# Altium PCB ArdUno_AADsm5-42b_pcb.PcbDoc
Units mm, origin at the board's own origin, x right, y up, seen from the top; angles counter-clockwise.
Board outline 68.58 x 53.34 mm, 2 copper layers (Top Layer, Bottom Layer), stack 1.57 mm thick; 64 components, 58 nets, 241 pads, 171 vias.
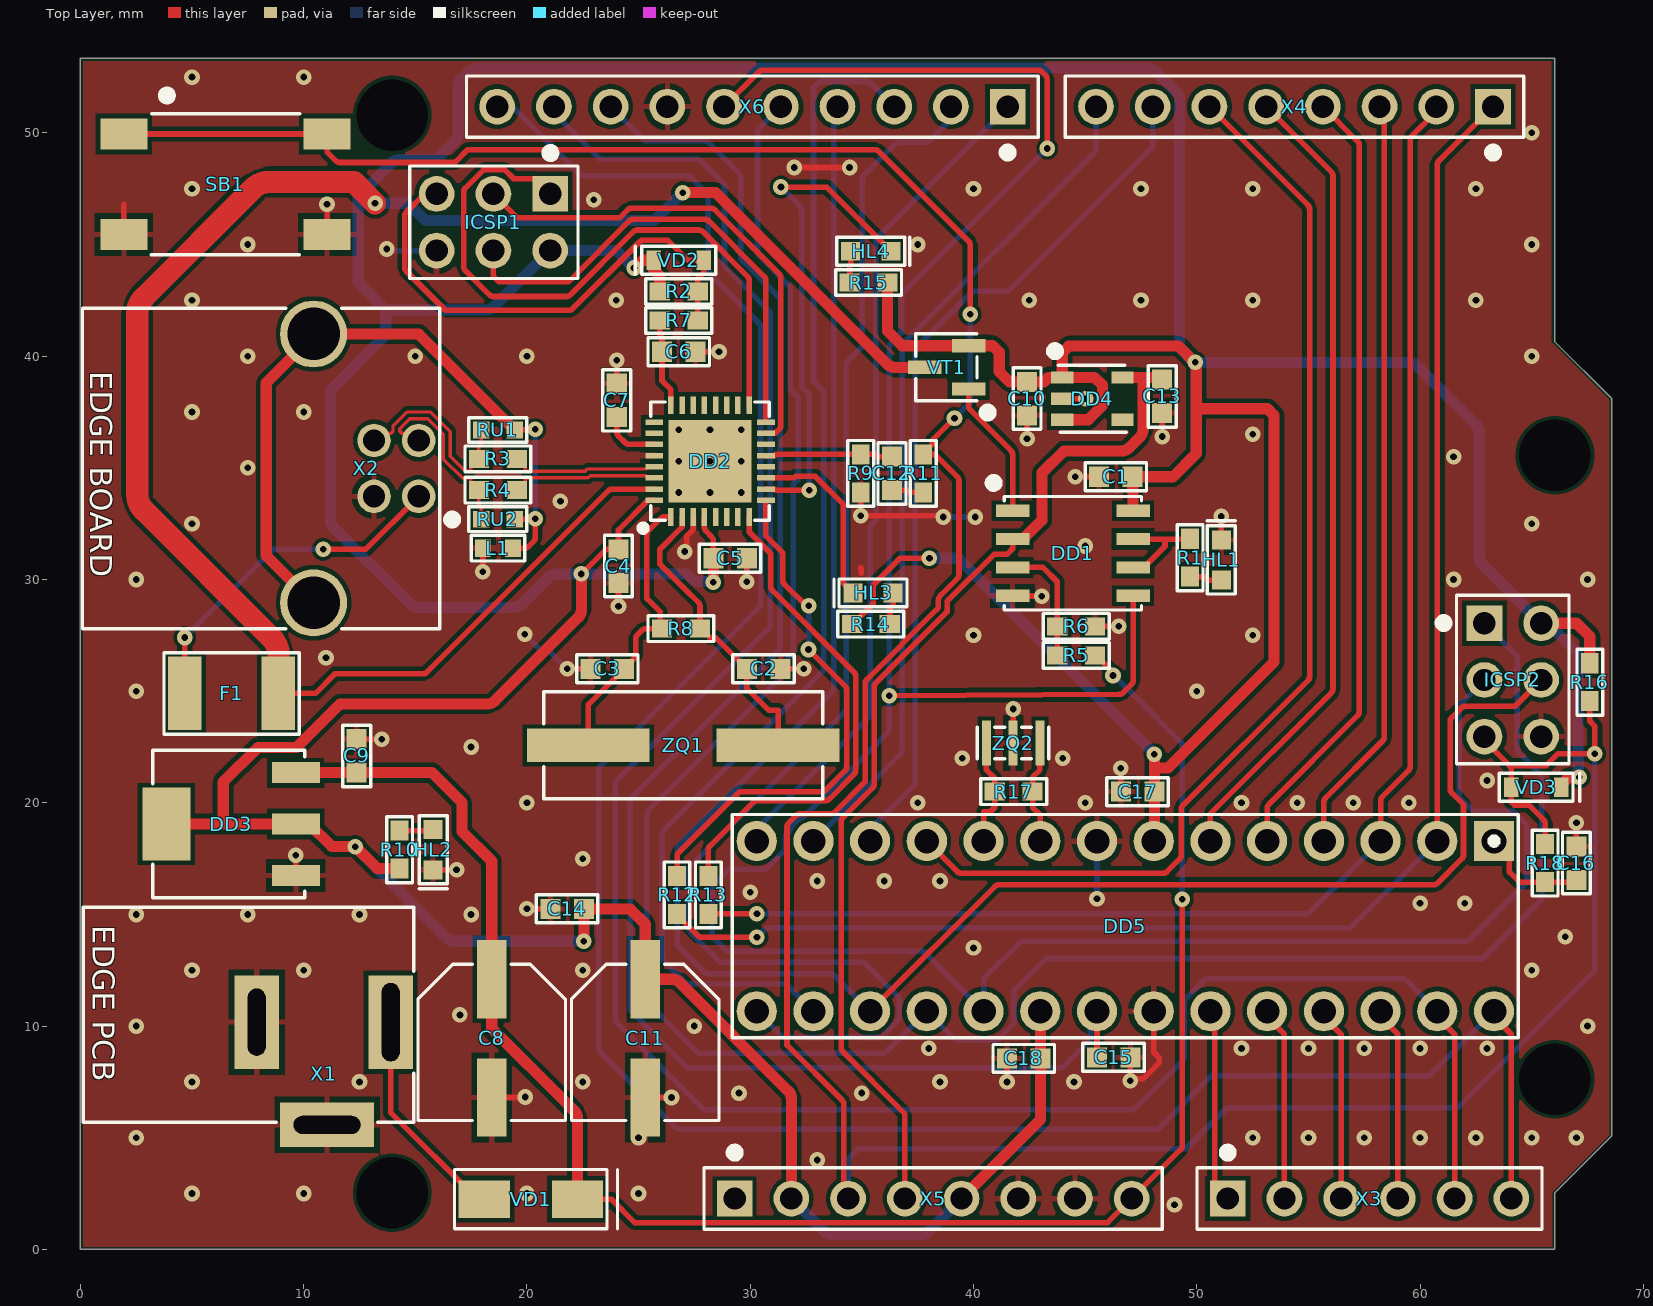
[diagram p0: Top Layer view]
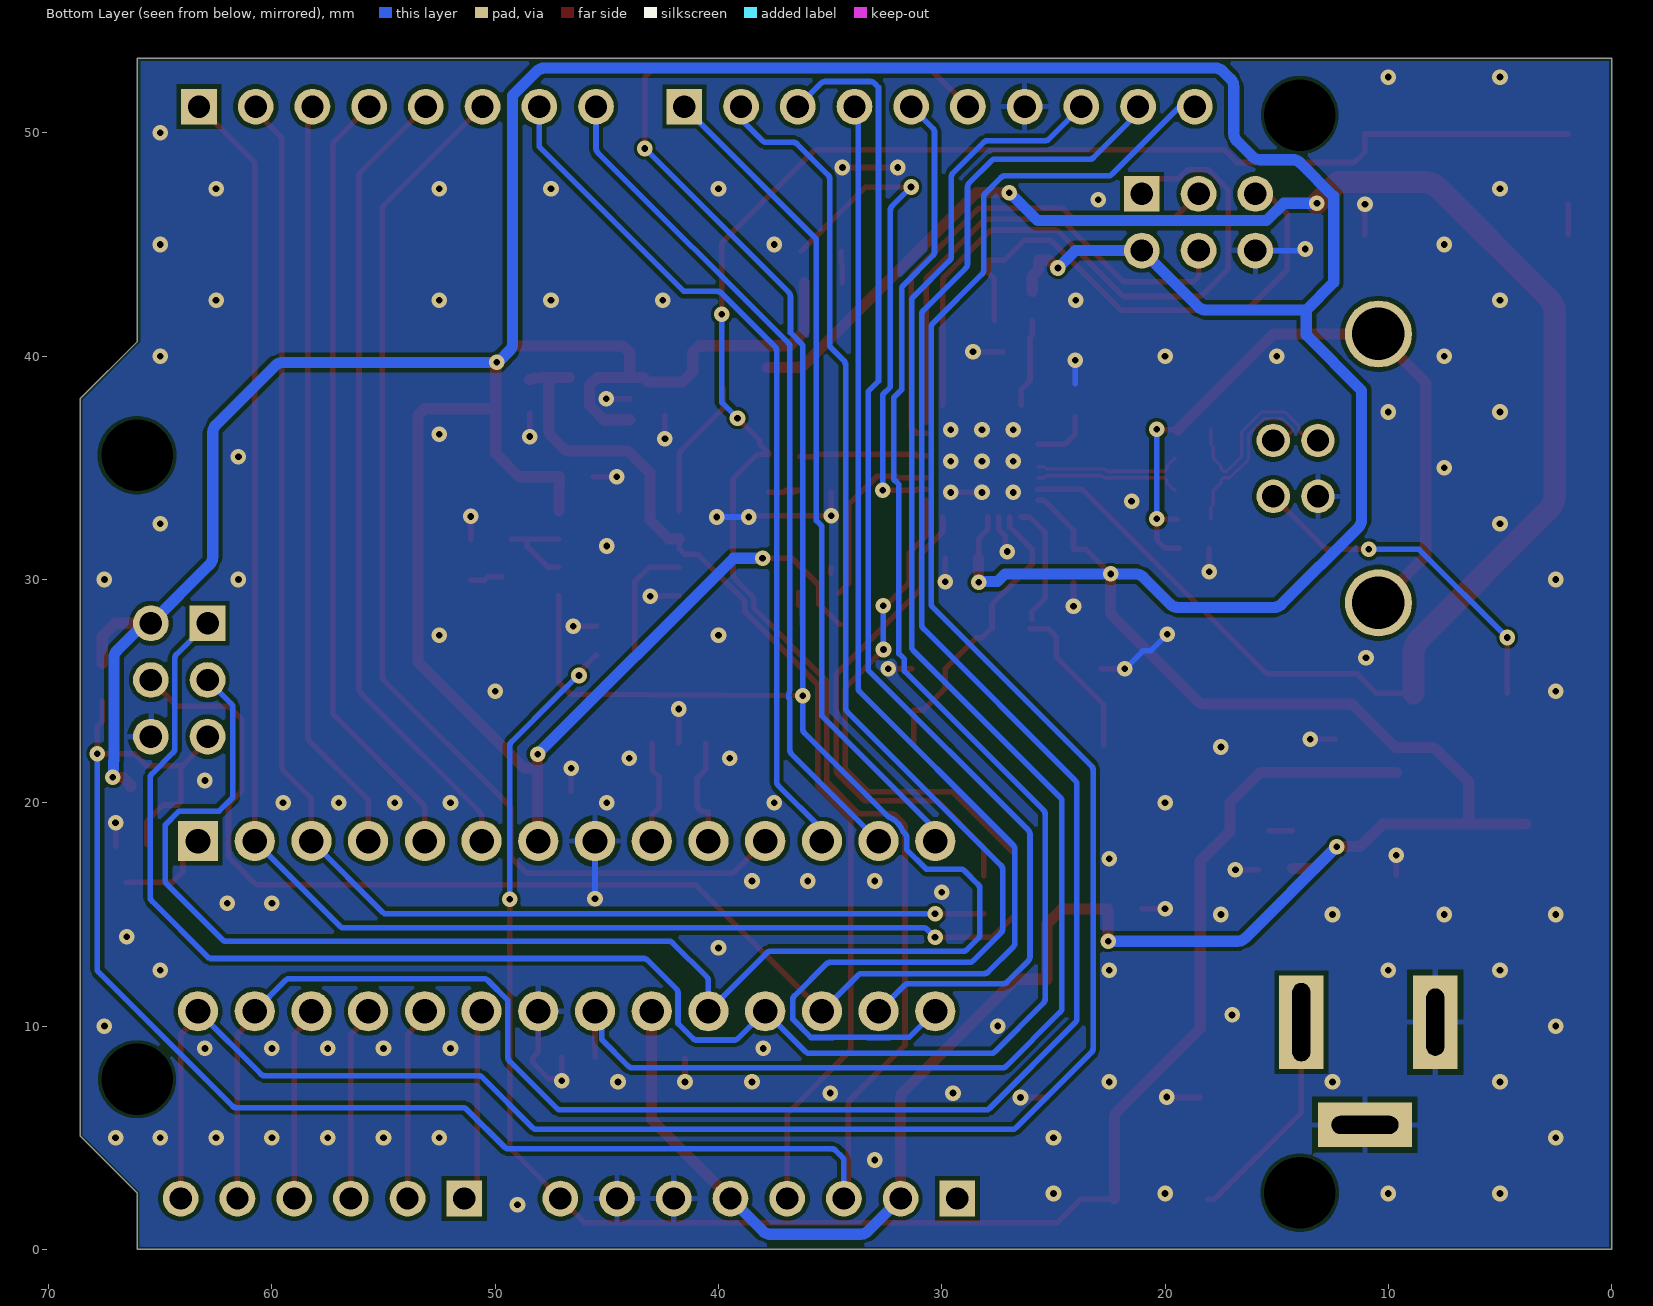
[diagram p1: Bottom Layer view, seen from below]
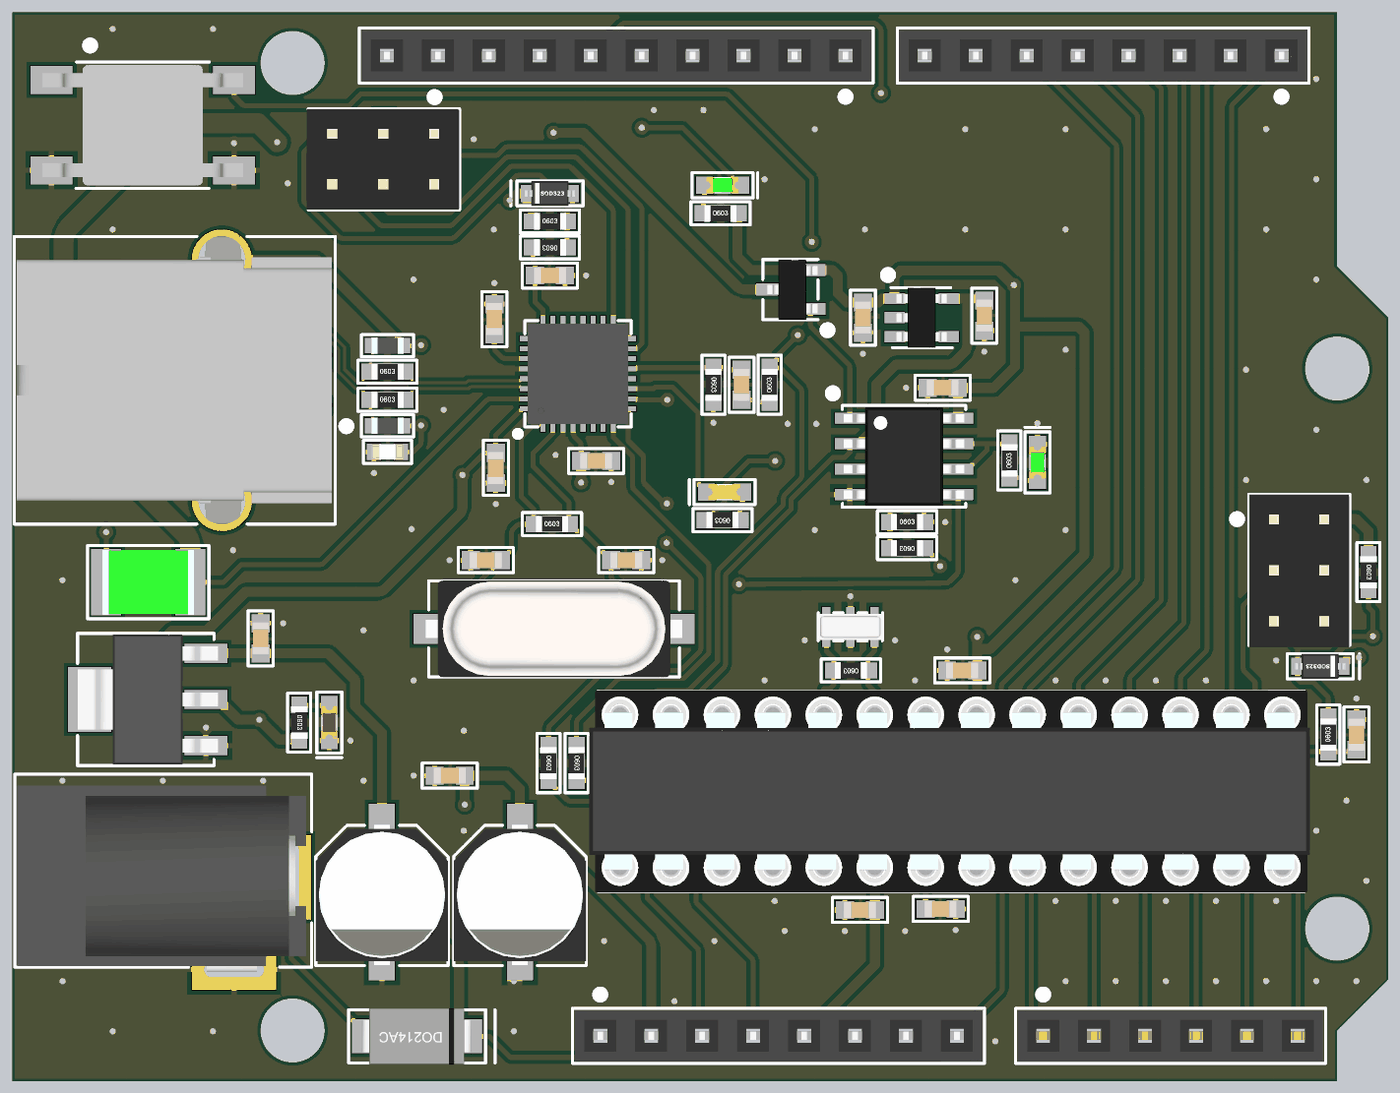
[diagram p2: 3D render of the assembled board from above, using the file's embedded part models]

## Layer stack, top to bottom
Top Solder: solder mask 0.01, Solder Resist, Dk 3.5
Top Layer: signal copper 0.035
Dielectric 1: dielectric 1.5, FR-4, Dk 4.6
Bottom Layer: signal copper 0.035
Bottom Solder: solder mask 0.01, Solder Resist, Dk 3.5

## Board outline
0,0 66.04,0 66.04,2.54 68.58,5.08 68.58,38.1 66.04,40.64 66.04,53.34 0,53.34

## Design rules (kind name [scope] priority, off if disabled: settings)
AcuteAngle [All] p1: minimum=6.00000000000000E+0001 checktracksonly=FALSE
Clearance Clearance_KeepOutLayer [OnLayer('Keep-Out Layer')] p1: gap=0.5 ignorepadtopadclearanceinfootprint=FALSE
Clearance [All] p2: gap=0.15 ignorepadtopadclearanceinfootprint=FALSE except(0.2: Track-Fill Track-Poly Track-Region SMDPad-Fill SMDPad-Poly SMDPad-Region THPad-Fill THPad-Poly THPad-Region Fill-Fill Fill-Poly Fill-Region Poly-Poly Poly-Region Region-Region)
ComponentClearance [All] p1: gap=0.2 collisioncheckmode=3 verticalgap=0.2 showdistances=FALSE
DiffPairsRouting DiffPairsRouting_USB [InDifferentialPair('USB0') Or InDifferentialPair('USB1')] p1: maxlimit=0.15 minlimit=0.15 mostfreqgap=0.15 toplayer_minwidth=0.15 toplayer_maxwidth=0.15 toplayer_prefwidth=0.15 bottomlayer_minwidth=0.15 bottomlayer_maxwidth=0.15 bottomlayer_prefwidth=0.15 maxuncoupledlength=10
DiffPairsRouting [All] p2: maxlimit=0.254 minlimit=0.254 mostfreqgap=0.254 toplayer_minwidth=0.381 toplayer_maxwidth=0.381 toplayer_prefwidth=0.381 bottomlayer_minwidth=0.381 bottomlayer_maxwidth=0.381 bottomlayer_prefwidth=0.381 maxuncoupledlength=12.7
HoleSize [All] p1: absolutevalues=TRUE maxlimit=3.5 minlimit=0.3 maxpercent=80.000 minpercent=20.000
HoleToHoleClearance [All] p1: gap=0.3 allowstackedmicrovias=TRUE
MatchedLengths [InDifferentialPair('USB0') Or InDifferentialPair('USB1')] p1: tolerance=1.905 checknetsindiffpair=TRUE checkdiffpairvsdiffpair=FALSE checkxsignals=FALSE checkothers=FALSE
MinimumAnnularRing [All] p1: minimumring=0.2
MinimumSolderMaskSliver [All] p1: minsoldermaskwidth=0.149
PolygonConnect PolygonConnect_Via [IsVia] p1: connectstyle=Direct reliefconductorwidth=0.254 reliefentries=4 polygonreliefangle="90 Angle" airgapwidth=0.254
PolygonConnect [All] p2: connectstyle=Relief reliefconductorwidth=0.25 reliefentries=4 polygonreliefangle="90 Angle" airgapwidth=0.25
RoutingVias [All] p1: holewidth=0.4 width=0.9 viastyle="Through Hole" minholewidth=0.3 minwidth=0.7 maxholewidth=0.5 maxwidth=1.1
SMDEntry [All] p1: side=TRUE corner=TRUE anyangle=TRUE
SMDNeckDown [All] p1: percent=100.000
SMDToCorner [All] p1: distance=0
SMDToPlane [All] p1: distance=0
SilkToSilkClearance [All] p1: silktosilkclearance=0
SilkToSolderMaskClearance [IsPad] p1: minsilkscreentomaskgap=0 clearancetoexposedcopper=FALSE
SolderMaskExpansion [All] p1: expansion=0.05 istentingtop=FALSE
SupplyNets "Schematic Supply Nets_3" [InNet('3V3')] p1: voltage=0.000
SupplyNets "Schematic Supply Nets_2" [InNet('GND')] p2: voltage=0.000
SupplyNets "Schematic Supply Nets_1" [InNet('VIN')] p3: voltage=0.000
SupplyNets "Schematic Supply Nets" [InNet('5V')] p4: voltage=0.000
Width [All] p1: maxlimit=5 minlimit=0.15 preferedwidth=0.25
23 further rules are at their usual default settings.

## Classes and differential pairs
differential pair USB1: +USB1_P -USB1_N
differential pair USB0: +USB0_P -USB0_N

## Components (designator, comment, footprint, x,y, rotation, side; value= is the part's Value field where it differs from the comment)
C1 "0,1мк" 0603_CAP 46.375,34.6 r0 top
C2 "22n" 0603_CAP 30.6,26 r0 top
C3 "22n" 0603_CAP 23.6,26 r180 top
C4 "0,1мк" 0603_CAP 24.1,30.6 r90 top
C5 "0,1мк" 0603_CAP 29.1,30.95 r180 top
C6 "н.у." 0603_CAP 26.8,40.2 r0 top
C7 "1мк" 0603_CAP 24.025,38.025 r270 top
C8 "4,7мк" 0607_ELECTR_CAP 18.425,9.45 r180 top locked
C9 "0,1мк" 0603_CAP 12.375,22.1 r270 top
C10 "0,1мк" 0603_CAP 42.4,38.1 r90 top
C11 "4,7мк" 0607_ELECTR_CAP 25.3,9.45 r180 top locked
C12 "0,1мк" 0603_CAP 36.35,34.75 r90 top
C13 "0,1мк" 0603_CAP 48.45,38.2 r90 top
C14 "0,1мк" 0603_CAP 21.8,15.25 r0 top
C15 "0,1мк" 0603_CAP 46.275,8.6 r180 top
C16 "н.у." 0603_CAP 67,17.3 r90 top
C17 "0,1мк" 0603_CAP 47.35,20.5 r0 top
C18 "0,1мк" 0603_CAP 42.25,8.55 r0 top
DD1 "LMV358IDR" SOIC-8 44.45,31.175 r0 top locked
DD2 "ATMEGA16U2-MU" QFN32_0.5_5x5mm 28.2,35.3 r90 top
DD3 "LM1117IMPX-5.0/NOPB" SOT223-4 6.75,19.05 r180 top locked
DD4 "LP2985-33DBVR" SOT23-5 45.325,38.1 r0 top locked
DD5 "ATMEGA328P-PU" DIP28_2.54 46.8,14.475 r270 top locked
F1 "MF-MSMF200-2" MF-MSMF200 6.775,24.9 r0 top locked
HL1 "Зеленый" 0603_LED_GREEN 51.1,30.875 r90 top
HL2 "Красный" 0603_LED_RED 15.8,17.9 r270 top
HL3 "Желтый" 0603_LED_YELLOW 35.5,29.4 r180 top
HL4 "Зеленый" 0603_LED_GREEN 35.4,44.7 r0 top
ICSP1 "Header 3x2" HDR2X3 18.5,46 r270 top locked
ICSP2 "Header 3x2" HDR2X3 64.15,25.5 r0 top locked
L1 "BLM18AG601SN1D" 0603_IND 18.7,31.4 r180 top
R1 "680" 0603_RES 49.7,30.975 r90 top
R2 "10к" 0603_RES 26.8,42.9 r0 top
R3 "22" 0603_RES 18.7,35.4 r0 top
R4 "22" 0603_RES 18.7,34 r0 top
R5 "10к" 0603_RES 44.6,26.6 r180 top
R6 "10к" 0603_RES 44.6,27.9 r0 top
R7 "22" 0603_RES 26.8,41.6 r180 top
R8 "1М" 0603_RES 26.9,27.8 r0 top
R9 "10к" 0603_RES 34.95,34.75 r270 top
R10 "680" 0603_RES 14.3,17.9 r270 top
R11 "0" 0603_RES 37.75,34.75 r90 top
R12 "1к" 0603_RES 26.725,15.875 r270 top
R13 "1к" 0603_RES 28.125,15.875 r270 top
R14 "680" 0603_RES 35.4,28 r180 top
R15 "680" 0603_RES 35.3,43.3 r0 top
R16 "10к" 0603_RES 67.6,25.4 r270 top
R17 "1М" 0603_RES 41.8,20.5 r180 top
R18 "22" 0603_RES 65.6,17.3 r90 top
RU1 "CG0603MLC-05E" 0603_VAR 18.7,36.7 r180 top
RU2 "CG0603MLC-05E" 0603_VAR 18.7,32.7 r180 top
SB1 "2-1437565-7" TACT_Switch 6.5,47.7 r0 top locked
VD1 "SS14-E3/61T" DO214AC(SMA) 20.175,2.25 r0 top locked
VD2 "BAT54HT1G" SOD-323 26.8,44.3 r0 top
VD3 "BAT54HT1G" SOD-323 65.2,20.7 r180 top
VT1 "SI2333DDS-T1-GE3" SOT-23 38.8,39.5 r180 top
X1 "DJK-02B" DJK-02B 10.9,7.875 r180 top locked
X2 "USB_TypeB" USB_TYPEB 12.8,34.975 r270 top locked
X3 "Header 6x1" PBS-6 57.734,2.276 r0 top locked
X4 "Header 8x1" PBS-8 54.375,51.175 r180 top locked
X5 "Header 8x1" PBS-8 38.194,2.276 r0 top locked
X6 "Header 10x1" PBS-10 30.1,51.175 r180 top locked
ZQ1 "16МГц" HC-49S 27,22.575 r0 top locked
ZQ2 "CSTCE16M0V53-R0" CSTCE16M0V53-R0 41.775,22.675 r0 top locked value="16 МГц"

## Footprints (in the part's own frame and the unit in brackets; to place one, negate y for a bottom-side part, rotate by r counter-clockwise, add the part's x,y. Pads: shape width x height; smd on the part's side, far side on the other; paste and mask are expansions set on the pad)
0603_CAP [mm]
  rect 0.9x0.9 smd: 1(-0.75,0) 2(0.75,0)
  silkscreen extent -1.37,-0.63 1.38,0.63, body extent -0.8,-0.4 0.8,0.4, height 0.8
0603_IND [mm]
  rect 0.7x0.8 smd: 1(-0.675,0) 2(0.675,0)
  silkscreen extent -1.2,-0.58 1.2,0.58, body extent -0.8,-0.4 0.8,0.4, height 0.8
0603_LED_GREEN [mm]
  rect 0.85x0.85 smd: A(-0.9,0) K(0.9,0)
  silkscreen extent -1.52,-0.63 1.75,0.63, body extent -0.8,-0.4 0.8,0.4, height 0.6
0603_LED_RED [mm]
  rect 0.85x0.85 smd: A(-0.9,0) K(0.9,0)
  silkscreen extent -1.52,-0.63 1.75,0.63, body extent -0.8,-0.4 0.8,0.4, height 0.6
0603_LED_YELLOW [mm]
  rect 0.85x0.85 smd: A(-0.9,0) K(0.9,0)
  silkscreen extent -1.52,-0.63 1.75,0.63, body extent -0.8,-0.4 0.8,0.4, height 0.6
0603_RES [mm]
  rect 0.9x0.8 smd: 1(-0.85,0) 2(0.85,0)
  silkscreen extent -1.47,-0.58 1.48,0.58, body extent -0.8,-0.41 0.8,0.41, height 0.45
0603_VAR [mm]
  rect 0.75x0.75 smd: 1(-0.75,0) 2(0.75,0)
  silkscreen extent -1.3,-0.55 1.3,0.55, body extent -0.8,-0.4 0.8,0.4, height 0.55
0607_ELECTR_CAP [mm]
  rect 1.3x3.5 smd: 1(0,-2.65) 2(0,2.65)
  silkscreen extent -3.3,-3.33 3.3,3.68, body extent -3.3,-3.35 3.3,3.65, height 8.11
CSTCE16M0V53-R0 [mm] "Quartz_CSTCE16M0V53-R0"
  rect 0.4x2 smd: 1(-1.2,0) 2(0,0) 3(1.2,0)
  silkscreen extent -1.6,-0.7 1.6,0.7, body extent -1.6,-0.65 1.6,0.65, height 1.01
DIP28_2.54 [mm]
  rect 1.8x1.8 hole 1.1: 1(-3.81,16.51)
  round 1.8 hole 1.1: 2(-3.81,13.97) 3(-3.81,11.43) 4(-3.81,8.89) 5(-3.81,6.35) 6(-3.81,3.81) 7(-3.81,1.27) 8(-3.81,-1.27) 9(-3.81,-3.81) 10(-3.81,-6.35) 11(-3.81,-8.89) 12(-3.81,-11.43) 13(-3.81,-13.97) 14(-3.81,-16.51) 15(3.81,-16.51) 16(3.81,-13.97) 17(3.81,-11.43) 18(3.81,-8.89) 19(3.81,-6.35) 20(3.81,-3.81) 21(3.81,-1.27) 22(3.81,1.27) 23(3.81,3.81) 24(3.81,6.35) 25(3.81,8.89) 26(3.81,11.43) 27(3.81,13.97) 28(3.81,16.51)
  silkscreen extent -5,-17.6 5,17.6, body extent -5.05,-18.05 5.05,17.89, height 6.65
DJK-02B [mm]
  rect 2x4.2 hole 0.8 slot 3.5 at 90 deg: 1(-3,-2.3)
  rect 4.2x2 hole 0.8 slot 3 at 0 deg: 2(-0.15,2.3)
  rect 2x4.2 hole 0.8 slot 3 at 90 deg: 3(3,-2.3)
  silkscreen extent -4.02,-7.45 10.78,2.17, body extent -3.75,-6.88 10.65,2.43, height 11
DO214AC(SMA) [mm] "DiodeSch_SS14-E3/61T"
  rect 2.3x1.68 smd: A(-2.09,0) K(2.09,0)
  silkscreen extent -3.41,-1.33 3.89,1.33, body extent -2.76,-1.4 2.73,1.4, height 2.26
HC-49S [mm]
  rect 5.5x1.5 smd: 1(-4.25,0) 2(4.25,0)
  silkscreen extent -6.25,-2.4 6.25,2.4, body extent -6.4,-2.41 6.4,2.41, height 4.3
HDR2X3 [mm]
  rect 1.6x1.6 hole 1: 1(-1.27,2.54)
  round 1.6 hole 1: 2(1.27,2.54) 3(-1.27,0) 4(1.27,0) 5(-1.27,-2.54) 6(1.27,-2.54)
  silkscreen extent -3.3,-3.75 2.52,3.79, body extent -2.49,-3.84 2.51,3.78, height 8.5
MF-MSMF200 [mm]
  rect 1.5x3.3 smd: 1(-2.1,0) 2(2.1,0)
  silkscreen extent -3.02,-1.83 3.03,1.83, body extent -2.27,-1.62 2.28,1.62, height 0.85
PBS-6 [mm]
  rect 1.6x1.6 hole 1: 1(-6.35,0)
  round 1.6 hole 1: 2(-3.81,0) 3(-1.27,0) 4(1.27,0) 5(3.81,0) 6(6.35,0)
  silkscreen extent -7.73,-1.38 7.73,2.25, body extent -7.62,-1.27 7.62,1.27, height 8.4
PBS-8 [mm]
  rect 1.6x1.6 hole 1: 1(-8.89,0)
  round 1.6 hole 1: 2(-6.35,0) 3(-3.81,0) 4(-1.27,0) 5(1.27,0) 6(3.81,0) 7(6.35,0) 8(8.89,0)
  silkscreen extent -10.26,-1.38 10.26,2.25, body extent -10.16,-1.27 10.16,1.27, height 8.4
PBS-10 [mm]
  rect 1.6x1.6 hole 1: 1(-11.43,0)
  round 1.6 hole 1: 2(-8.89,0) 3(-6.35,0) 4(-3.81,0) 5(-1.27,0) 6(1.27,0) 7(3.81,0) 8(6.35,0) 9(8.89,0) 10(11.43,0)
  silkscreen extent -12.8,-1.38 12.8,2.25, body extent -12.7,-1.27 12.7,1.27, height 8.4
QFN32_0.5_5x5mm [mm]
  rect 0.8x0.25 smd mask+0.05: 1(-2.5,1.75) 2(-2.5,1.25) 3(-2.5,0.75) 4(-2.5,0.25) 5(-2.5,-0.25) 6(-2.5,-0.75) 7(-2.5,-1.25) 8(-2.5,-1.75) 17(2.5,-1.75) 18(2.5,-1.25) 19(2.5,-0.75) 20(2.5,-0.25) 21(2.5,0.25) 22(2.5,0.75) 23(2.5,1.25) 24(2.5,1.75)
  rect 0.25x0.8 smd mask+0.05: 9(-1.75,-2.5) 10(-1.25,-2.5) 11(-0.75,-2.5) 12(-0.25,-2.5) 13(0.25,-2.5) 14(0.75,-2.5) 15(1.25,-2.5) 16(1.75,-2.5) 25(1.75,2.5) 26(1.25,2.5) 27(0.75,2.5) 28(0.25,2.5) 29(-0.25,2.5) 30(-0.75,2.5) 31(-1.25,2.5) 32(-1.75,2.5)
  rect 3.7x3.7 smd mask+0.05: EP(-0.001,0)
  silkscreen extent -3.15,-2.65 2.65,3.15, body extent -2.5,-2.5 2.5,2.5, height 0.9
SOD-323 [mm] "DiodeSch_BAT54HT1G"
  rect 0.65x0.86 smd: A(1.125,0) K(-1.125,0)
  silkscreen extent -1.95,-0.63 1.65,0.63, body extent -1.25,-0.63 1.25,0.63, height 0.99
SOIC-8 [mm]
  rect 1.5x0.55 smd: 1(-2.7,1.905) 2(-2.7,0.635) 3(-2.7,-0.635) 4(-2.7,-1.905) 5(2.7,-1.905) 6(2.7,-0.635) 7(2.7,0.635) 8(2.7,1.905)
  silkscreen extent -3.75,-2.54 3.08,3.35, body extent -3,-2.45 3,2.45, height 1.75
SOT23-5 [mm]
  rect 1x0.55 smd: 1(-1.35,0.95) 2(-1.35,0) 3(-1.35,-0.95) 4(1.35,-0.95) 5(1.35,0.95)
  silkscreen extent -1.87,-1.5 1.53,2.32, body extent -1.25,-1.5 1.25,1.5, height 1.1
SOT223-4 [mm]
  rect 2.15x0.95 smd: 1(-2.9,2.3) 2(-2.9,0) 3(-2.9,-2.3)
  rect 2.15x3.25 smd: 4(2.9,0)
  silkscreen extent -3.3,-3.3 3.5,3.3, body extent -3.5,-3.25 3.5,3.25, height 1.64
SOT-23 [mm]
  rect 1.5x0.6 smd: 1(-0.984,-0.97) 2(0.984,0) 3(-0.984,0.971)
  silkscreen extent -2.03,-1.5 1.39,2.22, body extent -1.33,-1.5 1.17,1.5, height 1.1
TACT_Switch [mm]
  rect 2.1x1.4 smd: 1(-4.55,2.25) 1(4.55,2.25) 2(-4.55,-2.25) 2(4.55,-2.25)
  silkscreen extent -3.33,-3.15 3.33,4.17, body extent -5,-3 5,3, height 4.36
USB_TYPEB [mm]
  round 3 hole 2.35: 0(-6.02,-2.355) 0(6.02,-2.355)
  round 1.5 hole 1: 1(1.25,2.355) 2(-1.25,2.355) 3(-1.25,0.355) 4(1.25,0.355)
  silkscreen extent -7.17,-12.7 7.17,4.05, body extent -7.19,-12.57 7.19,3.13, height 11.5

## Part data
C1 C4 C5 C9 C10 C12 C13 C14 C15 C17 C18: library part Capacitor, Dielectric=X7R, Package=0603, Tolerance=10%, ValueDescription="0,1мкФ  X7R 10% 0603 SMD", ValueType=Конденсатор
C2 C3: library part Capacitor, Dielectric=NP0, Package=0603, Tolerance=5%, ValueDescription="22nФ  NP0 5% 0603 SMD", ValueType=Конденсатор
C6 C16: library part Capacitor, Package=0603, ValueDescription="н.у.Ф    0603 SMD", ValueType=Конденсатор, Примечание="Не устанавливать"
C7: library part Capacitor, Dielectric=X7R, Package=0603, Tolerance=10%, ValueDescription="1мкФ  X7R 10% 0603 SMD", ValueType=Конденсатор
C8 C11: library part Capacitor_pol, Package=0607, Tolerance=20%, ValueDescription="4,7мкФ   20% 0607 SMD", ValueType=Конденсатор
DD1: Package=SOIC-8, ValueManufacturer="Texas Instruments", ValueType="Операционный усилитель", ValueManufacturerPartNumber=LMV358IDR
DD2: Package=QFN32_0.5_5x5mm, ValueDescription=Микроконтроллер, ValueManufacturer=ATMEGA, ValueManufacturerPartNumber=ATMEGA16U2-MU, ValueType=Микроконтроллер
DD3: Package=SOT-223, ValueManufacturer="Texas Instruments", ValueManufacturerPartNumber=LM1117IMPX-5.0, ValueType="Линейный стабилизатор напряжения"
DD4: Package=SOT23-5, ValueManufacturer="Texas Instruments", ValueType="Линейный стабилизатор напряжения", ValueManufacturerPartNumber=LP2985-33DBVR
DD5: Package=DIP28, ValueDescription=Микроконтроллер, ValueManufacturer=ATMEGA, ValueManufacturerPartNumber=ATMEGA328P-PU, ValueType=Микроконтроллер
F1: library part Fuse, ValueType=Предохранитель, ValueManufacturerPartNumber=MF-MSMF200-2
HL1 HL4: library part Led_green, Package=0603, Temp=-40C...+85C, ValueDescription=Светодиод, ValueManufacturer=Foryard, ValueManufacturerPartNumber=fyls-0603urc, ValueType=Светодиод
HL2: library part Led_red, Package=0603, Temp=-40C...+85C, ValueDescription=Светодиод, ValueManufacturer=Foryard, ValueManufacturerPartNumber=fyls-0603urc, ValueType=Светодиод
HL3: library part Led_yellow, Package=0603, Temp=-40C...+85C, ValueDescription=Светодиод, ValueManufacturer=Foryard, ValueManufacturerPartNumber=fyls-0603urc, ValueType=Светодиод
ICSP1 ICSP2: Package=HDR2X3, ValueDescription=PLD-6, ValueType="Разъем штыревой 2,54 мм"
L1: library part Inductor, ValueType=Индуктивность, ValueManufacturerPartNumber=BLM18AG601SN1D
R1 R10: library part Resistor, Package=0603, Power="0,1 Вт", Tolerance=5%, ValueDescription="680Ом 5% 0603 SMD", ValueType=Резистор
R2 R5 R6 R9 R16: library part Resistor, Package=0603, Tolerance=5%, ValueDescription="10кОм 5% 0603 SMD", ValueType=Резистор
R3 R4 R7 R18: library part Resistor, Package=0603, Tolerance=1%, ValueDescription="22Ом 1% 0603 SMD", ValueType=Резистор
R8 R17: library part Resistor, Package=0603, Tolerance=5%, ValueDescription="1МОм 5% 0603 SMD", ValueType=Резистор
R11: library part Resistor, Package=0603, Tolerance=5%, ValueDescription="0Ом 5% 0603 SMD", ValueType=Резистор
R12 R13: library part Resistor, Package=0603, Tolerance=1%, ValueDescription="1кОм 1% 0603 SMD", ValueType=Резистор
R14 R15: library part Resistor, Package=0603, Tolerance=5%, ValueDescription="680Ом 5% 0603 SMD", ValueType=Резистор
RU1 RU2: library part Varistor, ValueType=Варистор, ValueManufacturerPartNumber=CG0603MLC-05E
SB1: library part Button, ValueManufacturer="Te Connectivity", ValueType="Кнопка тактовая", ValueManufacturerPartNumber=2-1437565-7
VD1: library part DiodeSch_SS14-E3/61T, ValueDescription="Диод Шоттки", ValueManufacturer=Vishay, ValueManufacturerPartNumber=SS14-E3/61T, ValueType="Диод Шоттки"
VD2 VD3: library part DiodeSch_BAT54HT1G, ValueDescription="Диод Шоттки", ValueManufacturer="On Semiconductor", ValueManufacturerPartNumber=BAT54HT1G, ValueType="Диод Шоттки"
VT1: library part "Si2333DDS P_type", Package=SOT-23, ValueManufacturer=Vishay, ValueType=MOSFET, ValueManufacturerPartNumber=SI2333DDS-T1-GE3
X1: library part DJK-02B_PWR_CON, ValueManufacturer=KLS, ValueType="Разъем питания", ValueDescription=DJK-02B, ValueManufacturerPartNumber=DJK-02B
X2: ValueManufacturer="Te Connectivity", ValueManufacturerPartNumber=292304-1, ValueType="USB разъем тип B"
X3: Package=PBS-6, ValueType=Разъем
X4 X5: Package=PBS-8, ValueType=Разъем
X6: Package=PBS-10, ValueType=Разъем
ZQ1: library part Quartz, ValueType="Кварцевый резонатор"
ZQ2: library part Quartz_CSTCE16M0V53-R0, Package=HC-49S, Temp=-40C...+85C, Tolerance=0,5%, ValueManufacturer=Murata, ValueType="Керамический резонатор", ValueManufacturerPartNumber=CSTCE16M0V53-R0

## Free pads (board coordinates)
  round 0 hole 3.2 unplated: 0(13.97,2.54) 0(13.97,50.8) 0(66.04,7.62) 0(66.04,35.56)

## Via types
v1: diameter 0.7, hole 0.3, Top Layer to Bottom Layer, tented both sides, 162 vias
v2: diameter 0.7, hole 0.3, Top Layer to Bottom Layer, 9 vias

## Nets (pads, with @x,y where several pads share a name; then routed paths per layer and width w, separated by ;. In a path a pad name is that pad's centre, name@x,y a point inside that pad or via, vN(x,y) a via of type N, cw(c..) or ccw(c..) an arc to the next point about the centre after c; other vN are vias at no path point)
3V3: C13.2 DD1.2 DD4.5 X5.4 | length 47.3
  Top Layer w0.25: 34.147,8.853 cw(c34.325,9.029) 34.125,8.879 cw(c34.325,9.029) 34.075,9.029 34.075,19.156 cw(c34.325,19.155) 34.147,19.331 ; 34.148,8.852 36.851,6.149 cw(c36.674,5.972) 36.924,5.972 X5.4 ; 34.148,19.332 35.477,20.661 ccw(c35.3,20.837) 35.5,20.687 ccw(c35.3,20.837) 35.55,20.837 35.55,25.181 cw(c35.8,25.181) 35.623,25.358 38.825,28.559 38.825,29.029 40.921,31.125 41.5,31.125 41.75,31.375 DD1.2
  Top Layer w0.5: DD1.2 42.225,31.81 43.07,32.655 43.07,34.78 44.047,35.757 46.625,35.757 ccw(c46.625,36.257) 46.978,35.903 47.454,36.379 ccw(c47.1,36.732) 47.6,36.732 47.6,39.05 ; DD4.5 47.6,39.05 ; 47.983,39.05 47.6,39.05 ; C13.2@48.352,38.998 48.25,39.012 C13.2
5V: C1.2 C4.2 C5.2 C10.2 C11.1 C14.2 C17.2 C18.2 DD1.8 DD2.4 DD2.32 DD3.2 DD3.4 DD4.1 DD4.3 DD5.7 DD5.20 ICSP1.2 ICSP2.2 R2.1 R10.2 R14.2 R15.2 R16.1 VD2.K VD3.K VT1.1 X5.2 X5.5 | length 311
  Top Layer w0.25: v1(22.438,30.25) 23.538,31.35 C4.2 24.1,32.225 25.425,33.55 DD2.32 ; DD2.4 27.95,32.342 ccw(c28.2,32.342) 28.019,32.17 28.281,31.894 cw(c28.1,31.721) 28.35,31.721 C5.2 ; R14.2 34.6,28 35.502,28.902 35.502,29.741 36.711,30.95 v1(38.025,30.95)
  Top Layer w0.5: DD3.4 6.4,19.05 ; R10.2 13.3,17.05 v1(12.313,18.037) 11.262,18.037 10.25,19.05 DD3.2 6.4,19.05 ; v1(22.438,30.25) 22.438,28.645 cw(c21.938,28.645) 22.292,28.292 18.571,24.571 cw(c18.218,24.925) 18.218,24.425 11.625,24.425 9.675,22.475 7.95,22.475 6.4,20.925 6.4,19.05 ; v1(22.55,13.8) C14.2 24.625,15.25 25.3,14.575 C11.1 26.493,12.1 cw(c26.493,11.6) 26.846,11.954 31.699,7.101 cw(c31.344,6.749) 31.844,6.749 X5.2 ; v1(24.8,43.95) 24.854,43.95 25.204,44.3 VD2.K 25.675,43.87 25.95,43.595 R2.1 ; v1(28.35,29.875) C5.2 ; R15.2 36.15,41.125 36.805,40.47 VT1.1 40.857,40.47 41.15,40.178 41.15,39.312 41.612,38.85 C10.2 43.15,38.85 43.35,39.05 DD4.1 ; X5.5 43,5.812 43,8.1 C18.2 43,9.525 43,10.655 DD5.20 ; DD4.3 45.136,37.15 45.775,37.789 45.775,38.7 45.425,39.05 DD4.1 ; DD1.8 47.15,34.125 47.125,34.15 C1.2 48.932,34.6 49.975,35.643 49.975,37.646 ; DD5.7 48.1,18.315 C17.2 48.1,21.562 ; v1@48.075,22.2 v1(48.1,22.175) 48.1,21.562 ; ICSP2.2 67.01,28.04 67.6,27.45 R16.1 ; VD3.K 66.325,20.805 66.65,21.13 67.105,21.13 v1(67.125,21.15) ; DD4.1 43.975,40.157 44.268,40.45 49.175,40.45 49.975,39.65 49.975,37.646 ; 48.1,21.562 48.713,21.562 53.45,26.3 53.45,37.354 53.157,37.646 49.975,37.646
  Bottom Layer w0.5: v1(12.313,18.037) 16.404,13.946 16.405,13.945 ccw(c16.757,14.3) 16.757,13.8 v1(22.55,13.8) ; v1(24.8,43.95) 24.02,44.73 ICSP1.2 18.531,42.221 cw(c18.178,42.575) 18.178,42.075 13.675,42.075 ; v1(28.35,29.875) 28.312,29.913 27.512,29.913 27.175,30.25 v1(22.438,30.25) 21.332,30.25 ccw(c21.332,29.75) 20.979,30.104 19.771,28.896 cw(c19.418,29.25) 19.418,28.75 15.132,28.75 cw(c15.132,29.25) 14.832,28.85 cw(c15.132,29.25) 14.78,28.895 14.779,28.896 11.345,32.33 cw(c11.7,32.682) 11.2,32.681 11.2,38.468 13.675,40.943 13.675,42.075 ; X5.2 33.299,0.821 33.3,0.82 ccw(c33.652,1.175) 33.352,0.775 ccw(c33.652,1.175) 33.652,0.675 37.656,0.675 ccw(c37.656,1.175) 38.009,0.821 X5.5 ; v1(38.025,30.95) 39.325,30.95 v1(48.1,22.175) ; v1(67.125,21.15) 67.087,21.188 67.087,21.878 67.075,21.889 67.075,26.476 ccw(c66.575,26.476) 66.929,26.828 65.863,27.894 ccw(c65.511,27.54) 65.511,28.04 ICSP2.2 62.796,30.664 62.795,30.665 cw(c63.15,31.017) 62.65,31.017 62.65,36.568 ccw(c62.15,36.568) 62.504,36.921 59.846,39.579 ccw(c59.493,39.225) 59.493,39.725 v1(49.925,39.725) cw(c50.116,40.187) 49.764,39.832 49.371,40.225 cw(c49.725,40.578) 49.225,40.578 49.225,51.672 48.144,52.754 ccw(c47.79,52.4) 47.79,52.9 17.757,52.9 ccw(c17.757,52.4) 17.404,52.754 17.071,52.421 ccw(c17.425,52.068) 16.925,52.068 16.925,49.983 cw(c16.425,49.983) 16.779,49.631 16.095,48.946 cw(c15.742,49.3) 15.742,48.8 14.296,48.8 ccw(c14.296,48.3) 13.943,48.654 12.45,47.161 12.45,43.3 13.675,42.075
GND: C1.1 C2.2 C3.2 C4.1 C5.1 C6.2 C7.1 C8.2 C9.1 C10.1 C11.2 C13.1 C14.1 C15.1 C16.2 C17.1 C18.1 DD1.4 DD2.3 DD2.28 DD2.EP DD3.1 DD4.2 DD5.8 DD5.22 HL1.K HL2.K ICSP1.6 ICSP2.6 L1.2 R6.2 R9.2 SB1.2 X1.2 X1.3 X2.4 X5.6 X5.7 X6.7 ZQ2.2 | length 55.4
  Top Layer w0.25: SB1.2@1.95,45.45 1.95,46.8 ; DD3.1 v1(9.65,17.65) ; SB1.2@11.05,45.45 v1(11.05,46.8) ; C9.1 v1(13.5,22.85) ; HL2.K v1(16.85,17) ; v1(18.025,30.35) L1.2 ; C8.2 19.9,6.8 v1(19.925,6.825) ; v1(20,15.25) C14.1 ; v1(21.8,26) C3.2 ; C7.1 v1(24.025,39.825) ; v1(24.1,28.8) C4.1 ; C11.2 v1(26.475,6.8) ; v1(27.075,31.25) 27.161,31.336 27.161,31.958 27.45,32.247 DD2.3 ; C6.2@27.275,40.2 C6.2 v1(28.6,40.2) ; v2(28.2,33.899) v2(29.601,33.899) ; v1(29.85,29.9) C5.1 ; C2.2@31.675,25.925 C2.2 v1(32.4,26) ; v1(31.975,48.45) v1(34.45,48.45) ; 34.95,30.525 34.975,30.5 34.975,30.275 ; R9.2 v1(34.95,32.85) 38.6,32.85 v1(38.65,32.8) ; v1(41.5,7.5) C18.1 ; DD1.4 42.5,29.27 42.52,29.25 v1(43.05,29.25) ; ZQ2.2 v1(41.775,24.2) ; v1(42.4,36.3) C10.1 ; DD4.2 v1(45.025,38.1) ; v1(44.55,34.6) C1.1@45.6,34.6 ; R6.2 v1(46.5,27.9) ; C17.1 v1(46.6,21.55) ; C15.1 v1(47.025,7.55) 47.111,7.636 47.586,7.636 48.321,8.371 48.321,8.579 48.07,8.83 DD5.22 ; v1(48.45,36.4) C13.1 ; HL1.K v1(51.1,32.825) ; C16.2 v1(67,19.1)
  Bottom Layer w0.25: v1(13.725,44.8) 13.795,44.73 ICSP1.6 ; v1(19.9,27.55) 20.645,26.805 20.995,26.805 v1(21.8,26) ; 24.025,38.775 v1(24.025,39.825) ; v1(34.95,32.85) v1@35,32.8 ; v1(38.65,32.8) v1(40.075,32.8) ; v1(45.53,15.7) DD5.8
  other v1: 49,2 5,2.5 10,2.5 20,2.5 25,2.5 33,4 2.5,5 25,5 52.5,5 55,5 57.5,5 60,5 62.5,5 65,5 67,5 29.5,7 35,7 5,7.5 12.5,7.5 22.5,7.5 38.5,7.5 44.5,7.5 38,9 52,9 55,9 57.5,9 60,9 63,9 2.5,10 27.5,10 67.5,10 17,10.5 5,12.5 10,12.5 22.5,12.5 65,12.5 40,13.5 66.5,14 2.5,15 7.5,15 12.5,15 17.5,15 60,15.5 62,15.5 30,16 33,16.5 36,16.5 38.5,16.5 22.5,17.5 20,20 37.5,20 45,20 52,20 54.5,20 57,20 59.5,20 63,21 39.5,22 44,22 17.5,22.5 2.5,25 50,25 11,26.5 40,27.5 52.5,27.5 2.5,30 61.5,30 67.5,30 45,31.5 5,32.5 65,32.5 21.5,33.5 7.5,35 61.5,35.5 52.5,36.5 5,37.5 10,37.5 7.5,40 15,40 20,40 65,40 5,42.5 24,42.5 42.5,42.5 47.5,42.5 52.5,42.5 62.5,42.5 7.5,45 37.5,45 65,45 23,47 5,47.5 40,47.5 47.5,47.5 52.5,47.5 62.5,47.5 65,50 5,52.5 10,52.5
  other v2: 26.8,33.899 26.8,35.299 28.2,35.299 29.601,35.3 26.799,36.7 28.2,36.7 29.601,36.7
MBRXD: DD2.9 R12.1 | length 23.7
  Top Layer w0.25: R12.1 26.725,17.596 cw(c26.975,17.596) 26.798,17.773 29.452,20.427 cw(c29.629,20.25) 29.629,20.5 33.206,20.5 ccw(c33.206,20.75) 33.382,20.573 34.252,21.442 ccw(c34.075,21.619) 34.325,21.619 34.325,25.046 ccw(c34.075,25.046) 34.252,25.223 v1(32.612,26.863) ; DD2.9 30.7,31.955 31.45,31.205 31.45,29.981 ccw(c31.7,29.982) 31.522,29.806 32.431,28.898 ccw(c32.607,29.075) 32.607,28.825 v1(32.625,28.825)
  Bottom Layer w0.25: v1(32.612,26.863) 32.612,28.812 v1(32.625,28.825)
MBTXD: DD2.8 R13.1 | length 22.6
  Top Layer w0.25: R13.1 28.125,17.896 cw(c28.375,17.896) 28.198,18.073 30.152,20.027 cw(c30.329,19.85) 30.329,20.1 33.371,20.1 ccw(c33.371,20.35) 33.548,20.173 34.652,21.277 ccw(c34.475,21.454) 34.725,21.454 34.725,25.671 ccw(c34.475,25.671) 34.675,25.821 ccw(c34.475,25.671) 34.652,25.848 30.997,29.503 cw(c31.175,29.679) 30.925,29.677 30.925,31.06 ccw(c30.675,31.06) 30.852,31.237 29.95,32.139 DD2.8
NetC2_1: C2.1 DD2.2 R8.2 ZQ1.2 | length 13.2
  Top Layer w0.25: DD2.2 26.95,32.35 25.95,31.35 25.95,30.7 27.023,29.627 27.677,28.973 cw(c27.5,28.796) 27.75,28.796 R8.2 27.8,27.8 28.2,27.4 28.45,27.4 C2.1 29.85,25.125 30.825,24.15 31.25,24.15 ZQ1.2
NetC3_1: C3.1 DD2.1 R8.1 ZQ1.1 | length 12.5
  Top Layer w0.25: ZQ1.1 22.75,24.4 C3.1 24.802,26.452 ccw(c24.625,26.629) 24.875,26.629 24.875,27.346 cw(c25.125,27.346) 24.948,27.523 25.152,27.727 cw(c25.329,27.55) 25.329,27.8 R8.1 ; 25.975,28.225 25.975,28.55 25.375,29.15 25.375,32.021 cw(c25.625,32.021) 25.448,32.198 25.977,32.727 cw(c26.154,32.55) 26.154,32.8 DD2.1
NetC6_1: C6.1 DD2.24 R7.2 | length 4
  Top Layer w0.25: R7.2 25.95,40.95 26.05,40.85 C6.1 26.05,38.9 26.45,38.5 DD2.24
NetC7_2: C7.2 DD2.27 | length 2.6
  Top Layer w0.25: C7.2 24.025,36.604 ccw(c24.275,36.604) 24.098,36.427 24.402,36.123 ccw(c24.579,36.3) 24.579,36.05 DD2.27
NetC12_1: C12.1 R11.1 | length 1.8
  Top Layer w0.25: C12.1@36.675,33.9 C12.1 36.975,34 37.075,33.9 R11.1
NetC12_2: C12.2 DD2.13 R9.1 | length 5.7
  Top Layer w0.25: DD2.13 31.1,35.55 31.15,35.6 R9.1 35.35,35.6 35.6,35.6 35.7,35.5 C12.2
NetC15_2: C15.2 DD5.21 X6.8 | length 74
  Top Layer w0.25: C15.2 45.525,9.05 45.53,9.055 DD5.21 DD5.21@45.81,10.385
  Bottom Layer w0.25: X6.8 25.202,49.723 ; 25.202,49.722 ccw(c25.378,49.9) 25.228,49.7 ccw(c25.378,49.9) 25.378,49.65 27.946,49.65 cw(c27.946,49.4) 28.096,49.6 cw(c27.946,49.4) 28.123,49.577 29.502,48.198 cw(c29.325,48.021) 29.575,48.021 29.575,44.452 ccw(c29.825,44.454) 29.647,44.278 31.277,42.648 cw(c31.1,42.471) 31.3,42.621 cw(c31.1,42.471) 31.35,42.471 31.35,27.004 cw(c31.1,27.004) 31.277,26.827 24.698,20.248 ccw(c24.875,20.071) 24.625,20.071 24.625,10.802 ccw(c24.875,10.804) 24.698,10.627 27.127,8.198 ; 27.128,8.197 ccw(c27.304,8.375) 27.154,8.175 ccw(c27.304,8.375) 27.304,8.125 43.846,8.125 ccw(c43.846,8.375) 44.023,8.198 45.233,9.408 45.233,10.368 DD5.21
NetC16_1: C16.1 DD5.1 R18.1 | length 4.4
  Top Layer w0.25: DD5.1 64,17.595 64,16.9 64.45,16.45 R18.1 66.525,16.45
NetDD1_1: DD1.1 VT1.3 | length 6.2
  Top Layer w0.25: VT1.3 39.784,37.77 ccw(c40.034,37.77) 39.857,37.593 41.677,35.773 cw(c41.5,35.596) 41.75,35.596 DD1.1
NetDD1_3: DD1.3 R5.2 R6.1 | length 5.6
  Top Layer w0.25: DD1.3 43.11,30.54 43.75,29.9 R6.1 43.75,27 R5.2
NetDD1_5: DD1.5 DD5.19 ICSP2.3 X6.6 | length 128.7
  Top Layer w0.25: X6.6 30.382,52.727 cw(c30.559,52.55) 30.559,52.8 42.896,52.8 cw(c42.896,52.55) 43.073,52.727 43.227,52.573 cw(c43.05,52.396) 43.3,52.396 v1(43.3,49.3) ; v1(36.225,24.8) 46.53,24.858 ccw(c46.529,25.108) 46.705,24.93 47.077,25.302 ccw(c46.9,25.479) 47.15,25.479 DD1.5
  Bottom Layer w0.25: v1(43.3,49.3) 36.848,42.848 ccw(c37.025,42.671) 36.775,42.671 36.775,41.056 36.298,40.58 ccw(c36.475,40.403) 36.225,40.403 36.225,23.304 cw(c35.975,23.304) 36.152,23.127 32.44,19.415 cw(c32.264,19.593) 32.365,19.364 ccw(c32.83,18.285) 31.751,18.751 cw(c31.522,18.851) 31.7,18.675 31.646,18.621 ccw(c31.823,18.445) 31.573,18.445 31.573,17.907 30.695,17.028 29.157,17.028 ccw(c29.157,16.778) 28.981,16.956 28.373,16.348 ccw(c28.55,16.171) 28.3,16.171 28.3,14.102 ccw(c28.55,14.104) 28.372,13.928 28.877,13.423 ccw(c29.054,13.6) 29.054,13.35 37.661,13.35 cw(c37.661,13.1) 37.838,13.277 DD5.19 40.45,12.021 cw(c40.7,12.021) 40.523,12.198 42.052,13.727 cw(c42.229,13.55) 42.229,13.8 62.046,13.8 ccw(c62.046,14.05) 62.223,13.873 64.702,16.352 ccw(c64.525,16.529) 64.775,16.529 64.775,19.009 64.156,19.628 62.369,19.628 61.75,20.247 61.75,24.266 cw(c62,24.266) 61.823,24.443 ICSP2.3
NetDD1_6: DD1.6 DD1.7 R1.2 | length 4.3
  Top Layer w0.25: DD1.6 47.625,30.54 48.575,31.49 48.575,31.81 ; DD1.7 48.575,31.81 ; 49.285,31.81 48.575,31.81
NetDD2_15: DD2.15 ICSP1.3 | length 22.3
  Top Layer w0.25: ICSP1.3 19.575,46.195 24.154,46.195 24.511,46.552 cw(c24.688,46.375) 24.688,46.625 28.246,46.625 cw(c28.246,46.375) 28.423,46.552 31.302,43.673 cw(c31.125,43.496) 31.325,43.646 cw(c31.125,43.496) 31.375,43.496 31.375,36.811 31.114,36.55 DD2.15
NetDD2_16: DD2.16 ICSP1.4 | length 22.1
  Top Layer w0.25: ICSP1.4 18.5,43.575 18.75,43.325 21.746,43.325 ccw(c21.746,43.575) 21.923,43.398 24.577,46.052 cw(c24.754,45.875) 24.754,46.125 27.971,46.125 cw(c27.971,45.875) 28.148,46.052 30.627,43.573 cw(c30.45,43.396) 30.7,43.397 DD2.16
NetDD2_17: DD2.17 ICSP1.1 | length 30
  Top Layer w0.25: ICSP1.1@20.525,46.775 20.545,46.775 ICSP1.1 20.365,47.945 19.41,47.945 19.01,48.345 18.055,48.345 17.248,47.538 ccw(c17.425,47.362) 17.175,47.362 17.175,44.004 ccw(c17.425,44.004) 17.248,43.827 18.327,42.748 ccw(c18.504,42.925) 18.354,42.725 ccw(c18.504,42.925) 18.504,42.675 21.766,42.675 ccw(c21.766,42.925) 21.942,42.748 24.771,45.577 cw(c24.948,45.4) 24.948,45.65 27.696,45.65 cw(c27.696,45.4) 27.873,45.577 29.877,43.573 cw(c29.7,43.396) 29.9,43.546 cw(c29.7,43.396) 29.95,43.396 DD2.17
NetDD2_31: DD2.31 F1.2 VT1.2 | length 82.5
  Top Layer w0.25: F1.2 10.525,24.9 11.404,25.779 15.35,25.779 ccw(c15.35,26.029) 15.526,25.851 23.652,33.977 cw(c23.829,33.8) 23.829,34.05 DD2.31
  Top Layer w0.5: v1(26.975,47.325) 28.45,47.325 36.129,39.646 ccw(c36.482,40) 36.482,39.5 VT1.2
  Top Layer w1: F1.2 8.875,26.661 ccw(c7.875,26.661) 8.584,27.366 2.842,33.108 cw(c3.55,33.814) 2.75,33.214 cw(c3.55,33.814) 2.55,33.814 2.55,41.911 cw(c3.55,41.911) 2.75,42.511 cw(c3.55,41.911) 2.842,42.617 7.733,47.508 cw(c8.439,46.8) 7.839,47.6 cw(c8.439,46.8) 8.439,47.8 12.25,47.8 v1(13.2,46.85)
  Bottom Layer w0.5: v1(13.2,46.85) 14.683,46.85 15.463,46.07 25.72,46.07 v1(26.975,47.325)
NetDD5_2: DD5.2 R12.2 X4.1 | length 70.2
  Top Layer w0.25: R12.2 26.725,14.975 27.652,14.048 ; 27.653,14.047 ccw(c27.829,14.225) 27.679,14.025 ccw(c27.829,14.225) 27.829,13.975 v1(30.3,13.975) ; DD5.2 60.77,48.576 cw(c61.02,48.576) 60.843,48.753 X4.1
  Bottom Layer w0.25: v1(30.3,13.975) 30.652,14.327 cw(c30.829,14.15) 30.829,14.4 56.781,14.4 ccw(c56.781,14.65) 56.958,14.473 DD5.2
NetDD5_3: DD5.3 R13.2 X4.2 | length 65.3
  Top Layer w0.25: R13.2 v1(30.3,15.025) ; DD5.3 58.23,20.087 cw(c58.48,20.087) 58.303,20.263 59.477,21.438 ccw(c59.3,21.614) 59.55,21.614 59.55,49.671 cw(c59.8,49.671) 59.623,49.848 60.652,50.877 ccw(c60.475,51.054) 60.725,51.054 X4.2
  Bottom Layer w0.25: v1(30.3,15.025) 54.866,15.025 ccw(c54.866,15.275) 55.043,15.098 DD5.3
NetDD5_4: DD5.4 X4.3 | length 34.1
  Top Layer w0.25: DD5.4 55.69,20.036 cw(c55.94,20.036) 55.763,20.213 58.327,22.777 ccw(c58.15,22.954) 58.4,22.954 58.4,50.856 ccw(c58.15,50.856) 58.327,51.033 X4.3
NetDD5_5: DD5.5 X4.4 | length 35.2
  Top Layer w0.25: DD5.5 53.15,19.746 cw(c53.4,19.746) 53.223,19.923 57.202,23.902 ccw(c57.025,24.079) 57.275,24.079 57.275,49.441 ccw(c57.025,49.441) 57.202,49.618 X4.4
NetDD5_6: DD5.6 X4.5 | length 36.4
  Top Layer w0.25: DD5.6 50.61,19.406 cw(c50.86,19.406) 50.683,19.583 56.027,24.927 ccw(c55.85,25.104) 56.1,25.104 56.1,48.076 ccw(c55.85,48.076) 56.027,48.253 X4.5
NetDD5_9: DD5.9 R17.1 ZQ2.3 | length 4.7
  Top Layer w0.25: ZQ2.3 42.975,21.475 42.65,21.15 R17.1 42.65,19.79 42.99,19.45 DD5.9
NetDD5_10: DD5.10 R17.2 ZQ2.1 | length 4.9
  Top Layer w0.25: DD5.10 40.45,19.6 40.75,19.6 40.95,19.8 R17.2 40.95,21.1 40.575,21.475 ZQ2.1
NetDD5_11: DD5.11 X4.6 | length 50.1
  Top Layer w0.25: DD5.11 39.272,16.923 ; 39.273,16.922 ccw(c39.449,17.1) 39.299,16.9 ccw(c39.449,17.1) 39.449,16.85 48.496,16.85 ccw(c48.496,17.1) 48.673,16.923 49.227,17.477 ccw(c49.05,17.654) 49.3,17.654 49.3,19.696 cw(c49.55,19.696) 49.373,19.873 54.977,25.477 ccw(c54.8,25.654) 55.05,25.654 55.05,46.586 ccw(c54.8,46.586) 54.977,46.763 X4.6
NetDD5_12: DD5.12 X4.7 | length 39
  Bottom Layer w0.25: DD5.12 35.37,18.716 cw(c35.62,18.716) 35.443,18.893 37.327,20.777 ccw(c37.15,20.954) 37.4,20.954 37.4,40.246 cw(c37.65,40.246) 37.473,40.423 39.877,42.827 cw(c40.054,42.65) 40.054,42.9 41.55,42.9 48.025,49.375 X4.7
NetDD5_13: DD5.13 X4.8 | length 38.1
  Bottom Layer w0.25: DD5.13 36.727,22.182 ccw(c36.55,22.359) 36.8,22.359 36.8,24.51 cw(c37.05,24.508) 36.814,24.591 ccw(c36.225,24.8) 36.85,24.8 ccw(c35.983,24.8) 36.811,25.056 ; 36.811,25.057 cw(c37.05,25.13) 36.8,25.13 36.8,40.412 cw(c37.05,40.412) 36.873,40.589 45.412,49.128 ccw(c45.235,49.304) 45.485,49.304 X4.8
NetDD5_14: DD5.14 X6.1 | length 37.5
  Bottom Layer w0.25: DD5.14 30.29,18.711 cw(c30.54,18.711) 30.363,18.888 35.369,23.894 35.369,32.386 35.618,32.634 35.618,45.236 40.882,50.5 X6.1
NetDD5_15: DD5.15 X6.2 | length 61.3
  Bottom Layer w0.25: 28.602,12.923 27.347,14.178 cw(c27.525,14.354) 27.275,14.352 27.275,17.021 cw(c27.525,17.021) 27.348,17.198 34.237,24.087 ccw(c34.06,24.263) 34.31,24.263 34.31,39.619 cw(c34.56,39.619) 34.383,39.796 34.952,40.365 ccw(c34.775,40.541) 35.025,40.541 35.025,47.946 cw(c35.275,47.946) 35.098,48.123 36.477,49.502 cw(c36.654,49.325) 36.654,49.575 37.846,49.575 ccw(c37.846,49.825) 38.023,49.648 38.917,50.542 ccw(c38.74,50.718) 38.99,50.718 X6.2 ; 28.603,12.922 ccw(c28.779,13.1) 28.779,12.85 34.996,12.85 cw(c34.996,12.6) 35.173,12.777 36.602,11.348 cw(c36.425,11.171) 36.625,11.321 cw(c36.425,11.171) 36.675,11.171 36.675,10.308 35.857,9.49 34.883,9.49 34.87,9.504 33.33,9.504 33.317,9.49 32.343,9.49 32.33,9.504 31.451,9.504 DD5.15
NetDD5_16: DD5.16 X6.3 | length 54.1
  Bottom Layer w0.25: DD5.16 31.668,11.827 ccw(c31.491,11.65) 31.491,11.9 27.254,11.9 cw(c27.254,12.15) 27.077,11.973 26.122,12.928 cw(c26.3,13.104) 26.05,13.102 26.05,18.593 cw(c26.3,18.593) 26.123,18.77 33.3,25.946 33.3,38.416 32.835,38.881 32.835,52.038 33.023,52.227 cw(c33.2,52.05) 33.2,52.3 35.221,52.3 cw(c35.221,52.05) 35.398,52.227 X6.3
NetDD5_17: DD5.17 ICSP2.4 X6.4 | length 91
  Top Layer w0.25: DD5.17 40.957,16.252 cw(c41.134,16.075) 41.134,16.325 60.596,16.325 ccw(c60.596,16.575) 60.773,16.398 61.872,17.497 ccw(c61.695,17.674) 61.945,17.674 61.945,19.918 61.423,20.439 ; 61.422,20.44 cw(c61.6,20.616) 61.4,20.466 cw(c61.6,20.616) 61.35,20.616 61.35,23.646 cw(c61.6,23.646) 61.423,23.823 61.851,24.251 cw(c62.027,24.073) 62.027,24.323 64.243,24.323 ICSP2.4
  Bottom Layer w0.25: 27.927,12.423 26.797,13.553 cw(c26.975,13.729) 26.725,13.727 26.725,17.921 cw(c26.975,17.921) 26.798,18.098 33.677,24.977 ccw(c33.5,25.154) 33.75,25.154 33.75,50.911 cw(c34,50.911) 33.823,51.088 X6.4 ; 27.928,12.422 ccw(c28.104,12.6) 28.104,12.35 33.581,12.35 cw(c33.581,12.1) 33.758,12.277 DD5.17@35.304,10.731 ; DD5.17@35.239,10.665 DD5.17
NetDD5_18: DD5.18 ICSP2.1 X6.5 | length 103.2
  Bottom Layer w0.25: X6.5 30.398,50.203 ccw(c30.575,50.026) 30.325,50.026 30.325,44.677 ccw(c30.575,44.679) 30.397,44.503 31.727,43.173 cw(c31.55,42.996) 31.8,42.996 31.8,38.496 32.15,38.146 32.15,34.487 31.925,34.262 31.925,26.679 31.677,26.431 31.677,25.902 25.448,19.673 ccw(c25.625,19.496) 25.375,19.496 25.375,11.204 ccw(c25.625,11.204) 25.425,11.054 ccw(c25.625,11.204) 25.447,11.028 27.627,8.848 ccw(c27.804,9.025) 27.804,8.775 35.916,8.775 ccw(c35.916,9.025) 36.093,8.848 DD5.18 39.127,9.448 ; 39.128,9.447 ccw(c39.304,9.625) 39.154,9.425 ccw(c39.304,9.625) 39.304,9.375 40.971,9.375 ccw(c40.971,9.625) 41.148,9.448 41.815,10.115 41.815,11.486 cw(c42.065,11.486) 41.888,11.663 43.177,12.952 cw(c43.354,12.775) 43.354,13.025 62.696,13.025 ccw(c62.696,13.275) 62.873,13.098 65.377,15.602 ccw(c65.2,15.779) 65.45,15.779 65.45,21.121 ccw(c65.2,21.121) 65.377,21.298 ; ICSP2.1 64.277,26.643 cw(c64.1,26.466) 64.35,26.466 64.35,25.614 cw(c64.1,25.615) 64.349,25.594 ccw(c65.42,25.5) 64.345,25.5 64.345,22.96 ccw(c65.42,22.96) 64.345,22.95 64.35,22.426 ccw(c64.6,22.429) 64.422,22.253 ; 64.423,22.252 65.377,21.298
NetDD5_23: DD5.23 X3.1 | length 8.6
  Top Layer w0.25: DD5.23 50.784,10.205 cw(c50.55,10.116) 50.8,10.116 50.8,2.951 X3.1
NetDD5_24: DD5.24 X3.2 | length 8.7
  Top Layer w0.25: DD5.24 53.15,10.41 53.924,9.636 X3.2
NetDD5_25: DD5.25 X3.3 | length 8.7
  Top Layer w0.25: DD5.25 55.69,10.41 56.464,9.636 X3.3
NetDD5_26: DD5.26 X3.4 | length 8.7
  Top Layer w0.25: DD5.26 58.23,10.41 59.004,9.636 X3.4
NetDD5_27: DD5.27 X3.5 X6.9 | length 102
  Top Layer w0.25: DD5.27 60.77,10.41 61.544,9.636 X3.5
  Bottom Layer w0.25: X6.9 21.21,50.993 ccw(c21.46,50.993) 21.283,50.817 23.203,48.897 ccw(c23.379,49.075) 23.377,48.825 27.603,48.825 cw(c27.603,48.575) 27.78,48.752 28.777,47.755 cw(c28.6,47.578) 28.8,47.728 cw(c28.6,47.578) 28.85,47.578 28.85,44.127 ccw(c29.1,44.129) 28.922,43.953 30.827,42.048 cw(c30.65,41.871) 30.85,42.021 cw(c30.65,41.871) 30.9,41.871 30.9,27.979 cw(c30.65,27.979) 30.827,27.802 24.023,20.998 ccw(c24.2,20.821) 23.95,20.821 23.95,10.327 ccw(c24.2,10.329) 24.023,10.152 27.853,6.322 ccw(c28.029,6.5) 28.027,6.25 47.071,6.25 ccw(c47.071,6.5) 47.248,6.323 49.362,8.437 ccw(c49.185,8.614) 49.435,8.614 49.435,11.152 50.335,12.052 cw(c50.512,11.875) 50.512,12.125 59.206,12.125 cw(c59.206,11.875) 59.383,12.052 DD5.27
NetDD5_28: DD5.28 X3.6 X6.10 | length 105.7
  Top Layer w0.25: DD5.28 63.31,10.41 64.084,9.636 X3.6
  Bottom Layer w0.25: X6.10 19.246,51.175 cw(c19.246,50.925) 19.423,51.102 22.377,48.148 ccw(c22.554,48.325) 22.554,48.075 27.171,48.075 cw(c27.171,47.825) 27.321,48.025 cw(c27.171,47.825) 27.348,48.002 28.052,47.298 cw(c27.875,47.121) 28.125,47.121 28.125,43.852 ccw(c28.375,43.854) 28.197,43.678 30.402,41.473 cw(c30.225,41.296) 30.425,41.446 cw(c30.225,41.296) 30.475,41.296 30.475,28.929 cw(c30.225,28.929) 30.402,28.752 23.298,21.648 ccw(c23.475,21.471) 23.225,21.471 23.225,9.002 ccw(c23.475,9.004) 23.298,8.827 26.678,5.447 ccw(c26.854,5.625) 26.852,5.375 48.146,5.375 ccw(c48.146,5.625) 48.323,5.448 50.577,7.702 cw(c50.754,7.525) 50.754,7.775 60.316,7.775 ccw(c60.316,8.025) 60.493,7.848 DD5.28
NetF1_1: F1.1 X2.1 | length 15.6
  Top Layer w0.25: v1@4.65,27.425 v1(4.675,27.4) F1.1 ; v1(10.875,31.35) 12.78,31.35 X2.1
  Bottom Layer w0.25: v1(4.675,27.4) 8.625,31.35 v1(10.875,31.35)
NetHL1_A: HL1.A R1.1 | length 1.5
  Top Layer w0.25: R1.1 50.325,30.125 50.475,29.975 HL1.A
NetHL2_A: HL2.A R10.1 | length 1.1
  Top Layer w0.25: R10.1 15.355,18.75
NetHL3_A: HL3.A R14.1 | length 1.5
  Top Layer w0.25: R14.1 36.25,28.4 36.275,28.425 36.275,28.725 36.4,28.85 HL3.A
NetHL4_A: HL4.A R15.1 | length 1.4
  Top Layer w0.25: R15.1 34.45,44.075 34.5,44.125 HL4.A
NetICSP1_5: ICSP1.5 R2.2 R7.1 VD2.A | length 23.4
  Top Layer w0.25: ICSP1.5@16.188,46.812 cw(c16.365,46.988) 16.115,46.988 16.115,47.011 ccw(c15.865,47.011) 16.043,47.187 ICSP1.5 15.524,47.27 ccw(c15.524,47.02) 15.347,47.197 14.598,46.448 ccw(c14.775,46.271) 14.525,46.271 14.525,43.977 ccw(c14.775,43.979) 14.597,43.803 16.277,42.123 ccw(c16.454,42.3) 16.304,42.1 ccw(c16.454,42.3) 16.454,42.05 21.871,42.05 ccw(c21.871,42.3) 22.048,42.123 25.052,45.127 cw(c25.229,44.95) 25.229,45.2 26.3,45.2 27.2,44.3 VD2.A 27.925,43.75 27.65,43.475 R2.2 27.65,42 R7.1
NetICSP2_5: ICSP2.5 R11.2 R16.2 R18.2 SB1.1 VD3.A X5.3 | length 151.8
  Top Layer w0.25: SB1.1@1.95,49.95 11.05,49.95 11.05,49.15 11.452,48.748 ; 11.453,48.747 ccw(c11.629,48.925) 11.479,48.725 ccw(c11.629,48.925) 11.629,48.675 16.775,48.675 17.35,49.25 35.571,49.25 cw(c35.571,49) 35.748,49.177 39.777,45.148 cw(c39.6,44.971) 39.85,44.971 v1(39.85,41.875) ; 31.648,9.152 34.122,6.678 cw(c33.945,6.501) 34.195,6.501 34.195,2.569 ccw(c34.445,2.569) 34.268,2.392 X5.3 ; 31.648,9.152 31.648,18.919 cw(c31.898,18.919) 31.72,19.095 32.052,19.427 cw(c32.229,19.25) 32.229,19.5 33.596,19.5 ccw(c33.596,19.75) 33.773,19.573 35.15,20.95 35.15,25.346 cw(c35.4,25.346) 35.223,25.523 38.352,28.652 ccw(c38.175,28.829) 38.425,28.829 38.425,29.029 cw(c38.825,29.029) 38.543,29.312 39.277,30.047 ccw(c39.1,30.223) 39.35,30.223 39.35,34.42 ccw(c39.1,34.42) 39.3,34.57 ccw(c39.1,34.42) 39.277,34.597 38.347,35.527 ccw(c38.17,35.35) 38.17,35.6 38.025,35.6 R11.2 37.75,35.65 38.15,36.05 38.15,36.225 v1(39.15,37.225) ; ICSP2.5 62.88,22.783 64.002,21.661 ; R18.2 65.6,19.071 ccw(c65.35,19.071) 65.527,19.248 64.875,19.9 64.221,19.9 64.075,20.046 VD3.A 64.075,21.588 64.002,21.661 ; R16.2 67.6,23.65 67.825,23.425 v1(67.825,22.2) 66.18,22.2 65.642,21.661 64.002,21.661
  Bottom Layer w0.25: X5.3 34.384,3.955 cw(c34.634,3.955) 34.457,4.132 ; 34.457,4.132 34.752,4.427 cw(c34.929,4.25) 34.929,4.5 49.396,4.5 ccw(c49.396,4.75) 49.573,4.573 51.277,6.277 cw(c51.454,6.1) 51.454,6.35 61.596,6.35 ccw(c61.596,6.6) 61.773,6.423 67.752,12.402 ccw(c67.575,12.579) 67.825,12.579 v1(67.825,22.2) ; v1(39.15,37.225) 39.85,37.925 v1(39.85,41.875)
NetL1_1: L1.1 RU1.1 RU2.1 X2.0 | length 32.5
  Top Layer w0.25: L1.1 19.89,31.4 ccw(c19.89,31.65) 20.066,31.473 20.302,31.709 ccw(c20.125,31.885) 20.375,31.885 v1(20.375,32.725) ; RU2.1 v1@20.35,32.7 ; RU1.1 20.35,36.7 v1(20.375,36.725)
  Top Layer w0.5: X2.0@10.445,28.955 8.325,31.075 8.325,38.8 10.445,40.92 10.445,40.995 15.155,40.995 RU1.1
  Bottom Layer w0.25: v1(20.375,32.725) v1(20.375,36.725)
NetVD1_A: VD1.A X1.1 | length 9.8
  Top Layer w0.25: X1.1 13.9,6.125 17.775,2.25 VD1.A
RXLED: DD2.10 HL4.K | length 22.2
  Top Layer w0.25: DD2.10 31.1,34.05 31.15,34 v1(32.65,34) ; v1(31.375,47.575) 33.425,47.575 HL4.K
  Bottom Layer w0.25: v1(31.375,47.575) 32.227,46.723 cw(c32.05,46.546) 32.3,46.546 32.3,38.621 32.65,38.271 v1(32.65,34)
TXLED: DD2.11 HL3.K | length 8.2
  Top Layer w0.25: DD2.11 31.967,34.55 32.042,34.625 32.909,34.625 34.175,33.359 34.175,29.825 HL3.K
USB0_N: R4.1 RU2.2 X2.2 | length 8.3
  Top Layer w0.15: X2.2 14.79,36.225 14.473,36.542 14.393,36.542 14.305,36.63 14.305,36.754 14.751,37.2 15.559,37.2 16.264,36.495 16.264,35.394 17.108,34.55 17.4,34.55 17.488,34.462 17.488,34.325 17.813,34 R4.1 17.85,33.6 17.85,33.35 17.95,33.25 RU2.2
USB0_P: R3.1 RU1.2 X2.3 | length 8.8
  Top Layer w0.15: X2.3 13.52,36.225 13.837,36.542 13.917,36.542 14.005,36.63 14.005,36.878 14.627,37.5 15.683,37.5 16.564,36.62 16.564,35.518 17.232,34.85 17.4,34.85 17.488,34.938 17.488,35.075 17.813,35.4 R3.1 17.85,35.95 17.95,36.05 RU1.2
USB1_N: DD2.30 R4.2 | length 6.5
  Top Layer w0.15: R4.2 19.6,34 19.925,34.325 19.925,34.462 20.013,34.55 22.737,34.55 22.837,34.65 25.325,34.65 25.425,34.55 DD2.30
USB1_P: DD2.29 R3.2 | length 6.5
  Top Layer w0.15: R3.2 19.6,35.4 19.925,35.075 19.925,34.938 20.013,34.85 22.613,34.85 22.713,34.95 25.325,34.95 25.425,35.05 DD2.29
VIN: C8.1 C9.2 DD3.3 R5.1 VD1.K X5.8 | length 80.5
  Top Layer w0.25: VD1.K 23.776,2.25 24.825,1.201 46.009,1.201 X5.8 49.277,4.469 ccw(c49.1,4.646) 49.35,4.646 v1(49.35,15.675) ; R5.1 45.5,26.6 46.165,25.935 46.165,25.785 v1(46.25,25.7)
  Top Layer w0.5: DD3.3 11.925,21.35 C9.2 12.825,21.35 15.75,21.35 17.087,20.012 17.087,18.721 18.425,17.384 18.425,13.6 C8.1 18.425,9.9 21.814,6.511 22.119,6.206 cw(c21.765,5.853) 22.265,5.853 VD1.K
  Bottom Layer w0.25: v1@46.275,25.725 47.25,24.75 ; 47.25,24.75 49.277,22.723 ; 49.277,22.723 cw(c49.1,22.546) 49.35,22.546 v1(49.35,15.675)
pads on no net: DD2.5 DD2.6 DD2.7 DD2.12 DD2.14 DD2.18 DD2.19 DD2.20 DD2.21 DD2.22 DD2.23 DD2.25 DD2.26 DD4.4 X5.1

## Polygon pours and split planes (outlines as drawn)
GND on Bottom Layer "Bottom Layer-GND" (solid, remove dead copper, pour order 4): 0.125,0.125 0.125,53.2 65.875,53.2 65.875,40.625 65.9,40.625 68.479,38.046 68.475,38.042 68.475,5.1 65.925,2.55 65.925,0.125
GND on Top Layer "Top Layer-GND" (solid, remove dead copper, pour order 5): 0.125,0.125 0.125,53.2 65.875,53.2 65.875,40.625 65.9,40.625 68.475,38.05 68.475,5.1 65.925,2.55 65.925,0.125

## Text inside footprints (layer, text, board x,y; h text height)
X1: Top Overlay "EDGE PCB" at 0.55,14.525 h1 r270
X2: Top Overlay "EDGE BOARD" at 0.45,39.325 h1 r270